# EAGLE board lv1b-fc-1 (EAGLE 3.55)
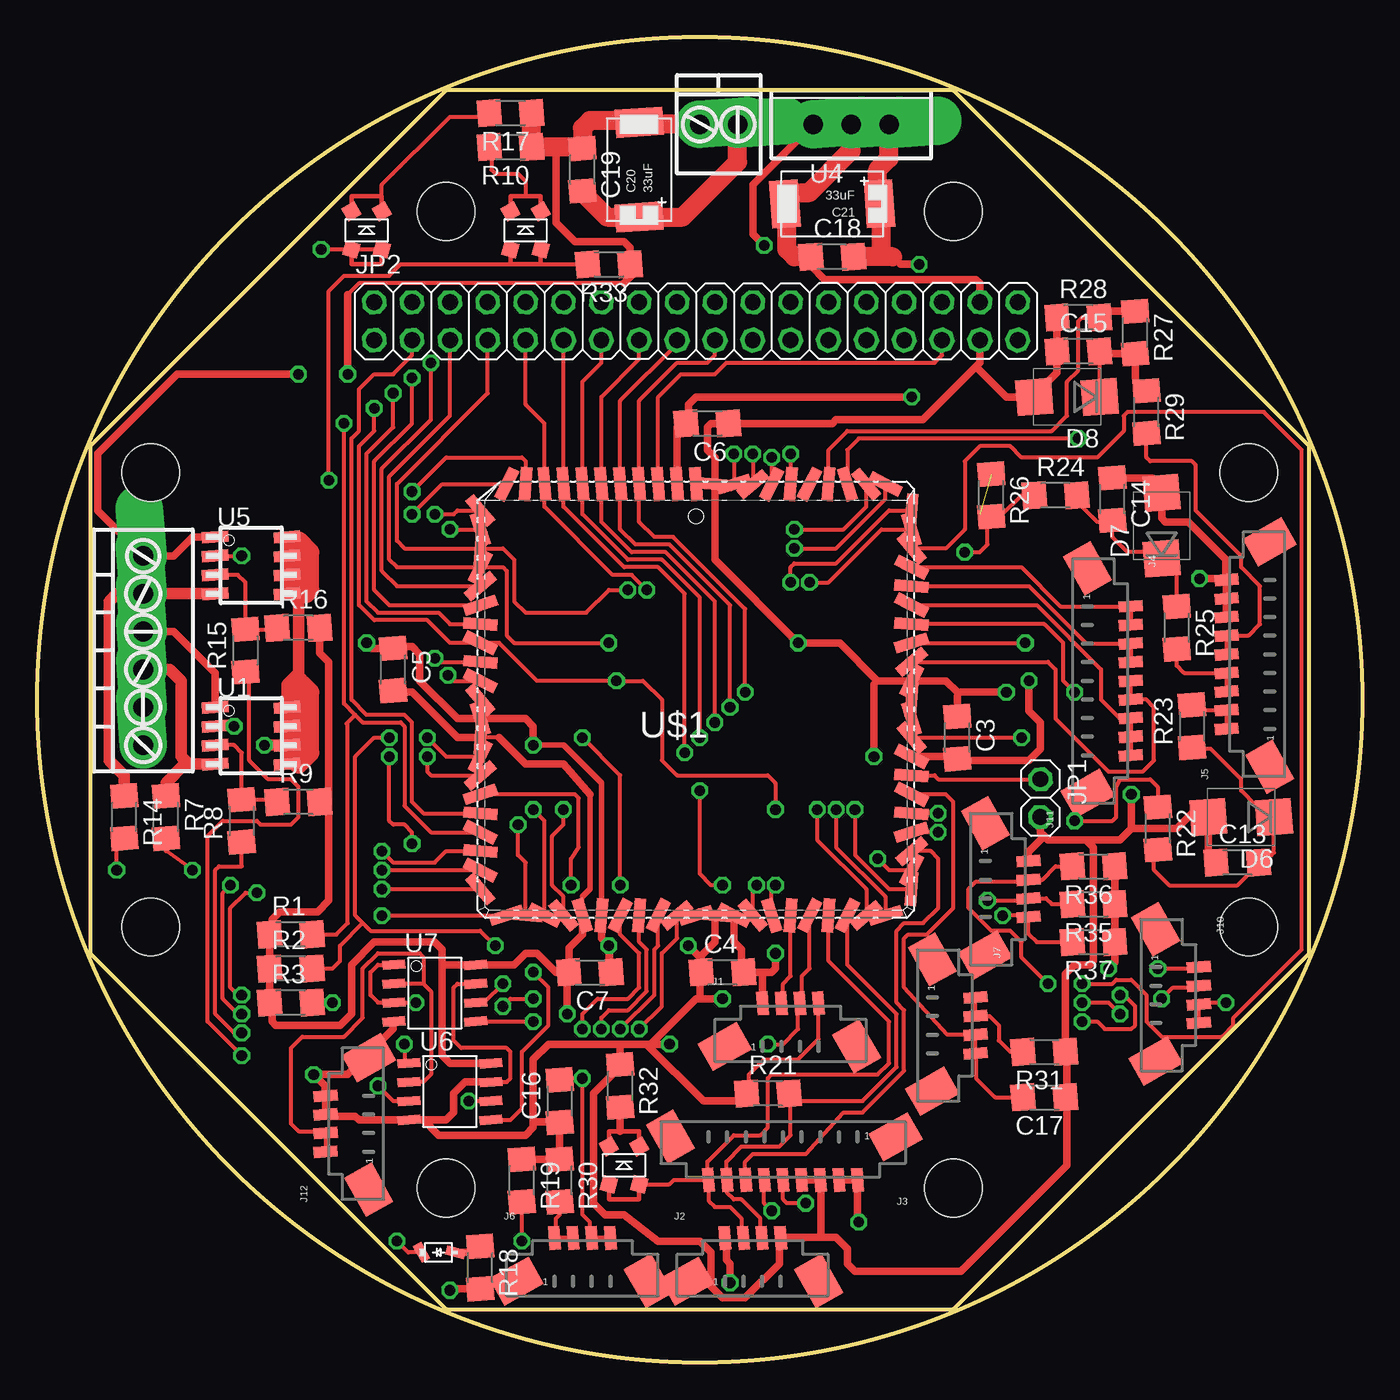
[diagram p0: board, top side]
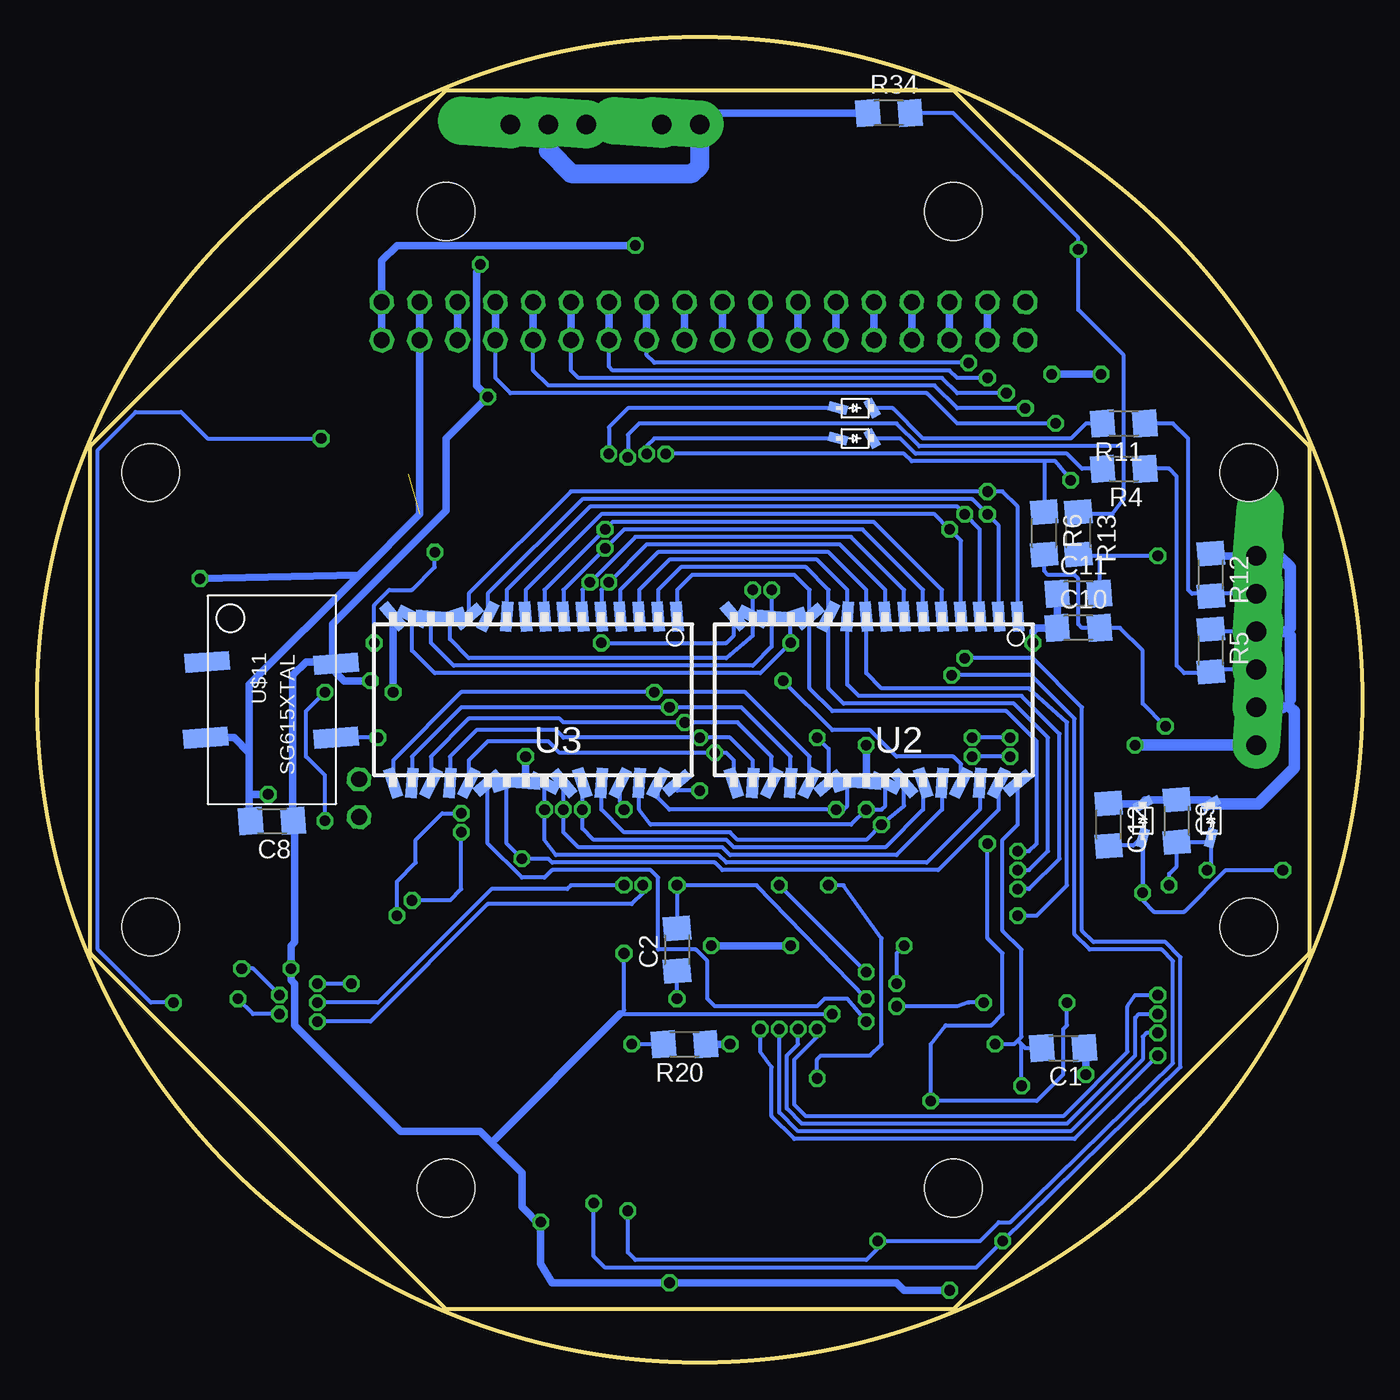
[diagram p1: board, bottom side, seen from below]

Size 88.9 x 88.9 mm. Coordinates in mm from the lower left corner, seen from the top.
Outline: 61.47,85.34 27.43,85.34 3.56,61.47 3.56,27.43 27.43,3.56 61.47,3.56 85.34,27.43 85.34,61.47 61.47,85.34
Outline: circle at 44.45,44.45 radius 44.45
Copper layers used: Top, Bottom
Holes 3.86 mm at 27.43,77.22 61.47,77.22 61.47,11.68 27.43,11.68 81.28,59.69 7.62,59.69 7.62,29.21 81.28,29.21
bKeepout: 2 lines
tRestrict: area 58.2,8.4 to 64.8,15; area 78.2,26.1 to 84.4,32.3; area 78.1,56.5 to 84.4,62.8; area 58.3,74.1 to 64.6,80.4; area 24.3,74.1 to 30.6,80.4; area 4.5,56.5 to 10.8,62.8; area 4.4,26 to 10.8,32.4; area 24.3,8.5 to 30.6,14.8

## Footprints (pad centres in the part's own frame; a part is rotated, then mirrored left to right if it is on the bottom)
206 = smd 1.6 x 1.803 rotated 4.4:  1.422,0 | smd 1.6 x 1.803 rotated 4.3:  -1.422,0
AD = smd 1.905 x 3.175 rotated 3.8:  -3.175,0 | smd 1.905 x 3.175 rotated 4:  3.175,0
INI2P = smd 1.27 x 0.635 rotated 119.4:  -1.143,0 | smd 1.27 x 0.635 rotated 344.5:  1.143,0
B = smd 2.4 x 2.4 rotated 4.3:  -2.2,0 | smd 2.4 x 2.4 rotated 4.4:  2.2,0
INLED = smd 1.016 x 1.016 rotated 344.5: 1 -1.016,1.27; 2 1.016,1.27 | smd 1.016 x 1.016 rotated 119.4: 1 -1.016,-1.27; 2 1.016,-1.27
SMD-4 = smd 2.1 x 3 rotated 209.7: HT 4.425,-0.4 | smd 2.1 x 3 rotated 119.2: T -4.425,-0.4 | smd 0.75 x 1.6 rotated 4.5:  0.625,2.5 | smd 0.75 x 1.6 rotated 4.6:  1.875,2.5 | smd 0.75 x 1.6 rotated 4.3:  -1.875,2.5 | smd 0.75 x 1.6 rotated 4.4:  -0.625,2.5
SMD-9 = smd 2.1 x 3 rotated 209.7: HT 7.55,-0.4 | smd 2.1 x 3 rotated 119.2: T -7.55,-0.4 | smd 0.75 x 1.6 rotated 4.9:  3.75,2.5 | smd 0.75 x 1.6 rotated 5:  5,2.5 | smd 0.75 x 1.6 rotated 4.3:  -5,2.5 | smd 0.75 x 1.6 rotated 4.4:  -3.75,2.5 | smd 0.75 x 1.6 rotated 4.7:  0,2.5;  1.25,2.5 | smd 0.75 x 1.6 rotated 4.8:  2.5,2.5 | smd 0.75 x 1.6 rotated 4.5:  -2.5,2.5 | smd 0.75 x 1.6 rotated 4.6:  -1.25,2.5
TB-6 = drill 1.321 pad 3.175 offset:  0,0;  2.54,0;  5.08,0;  7.62,0;  10.16,0;  12.7,0
TB-2 = drill 1.321 pad 3.175 offset:  -1.27,0;  1.27,0
02 = drill 1.067 pad 1.6 octagon:  -1.27,0;  1.27,0
18 = drill 1.067 pad 1.6 octagon:  -21.59,-1.27;  -21.59,1.27;  -19.05,-1.27;  -19.05,1.27;  -16.51,-1.27;  -16.51,1.27;  -13.97,-1.27;  -13.97,1.27;  -11.43,-1.27;  -11.43,1.27;  -8.89,-1.27;  -8.89,1.27;  -6.35,-1.27;  -6.35,1.27;  -3.81,-1.27;  -3.81,1.27;  -1.27,-1.27;  -1.27,1.27;  1.27,-1.27;  1.27,1.27;  3.81,-1.27;  3.81,1.27;  6.35,-1.27;  6.35,1.27;  8.89,-1.27;  8.89,1.27;  11.43,-1.27;  11.43,1.27;  13.97,-1.27;  13.97,1.27;  16.51,-1.27;  16.51,1.27;  19.05,-1.27;  19.05,1.27;  21.59,-1.27;  21.59,1.27
IC-8 = smd 0.762 x 1.778 rotated 4.3:  -1.778,-2.54 | smd 0.762 x 1.778 rotated 4.4:  -0.508,-2.54 | smd 0.762 x 1.778 rotated 4.5:  0.762,-2.54 | smd 0.762 x 1.778 rotated 4.6:  2.032,-2.54 | smd 0.762 x 1.778 rotated 4.7:  2.032,2.286;  0.762,2.286 | smd 0.762 x 1.778 rotated 4.8:  -0.508,2.286 | smd 0.762 x 1.778 rotated 4.9:  -1.778,2.286
OP = smd 0.762 x 2.032 rotated 4.5:  -7.112,-5.588;  -7.112,5.588 | smd 0.762 x 2.032 rotated 4.6:  -5.842,-5.588 | smd 0.762 x 2.032 rotated 49.4:  3.048,5.588 | smd 0.762 x 2.032 rotated 26.9:  4.318,5.588 | smd 0.762 x 2.032 rotated 4.4:  5.588,5.588;  -8.382,-5.588 | smd 0.762 x 2.032 rotated 206.8:  6.858,5.588 | smd 0.762 x 2.032 rotated 184.3:  8.128,5.588 | smd 0.762 x 2.032 rotated 161.8:  9.398,5.588 | smd 0.762 x 2.032 rotated 71.9:  1.778,5.588 | smd 0.762 x 2.032 rotated 94.4:  0.508,5.588 | smd 0.762 x 2.032 rotated 116.9:  -0.762,5.588 | smd 0.762 x 2.032 rotated 139.4:  -2.032,5.588 | smd 0.762 x 2.032 rotated 161.9:  -3.302,5.588 | smd 0.762 x 2.032 rotated 184.4:  -4.572,5.588 | smd 0.762 x 2.032 rotated 206.9:  -5.842,5.588 | smd 0.762 x 2.032 rotated 27:  -8.382,5.588 | smd 0.762 x 2.032 rotated 49.5:  -9.652,5.588 | smd 0.762 x 2.032 rotated 4.3:  -9.652,-5.588;  1.778,-5.588 | smd 0.762 x 2.032 rotated 4.7:  -4.572,-5.588;  -3.302,-5.588 | smd 0.762 x 2.032 rotated 4.8:  -2.032,-5.588 | smd 0.762 x 2.032 rotated 4.9:  -0.762,-5.588 | smd 0.762 x 2.032 rotated 5:  0.508,-5.588 | smd 0.762 x 2.032 rotated 26.8:  3.048,-5.588 | smd 0.762 x 2.032 rotated 49.3:  4.318,-5.588 | smd 0.762 x 2.032 rotated 71.8:  5.588,-5.588 | smd 0.762 x 2.032 rotated 94.3:  6.858,-5.588 | smd 0.762 x 2.032 rotated 116.8:  8.128,-5.588 | smd 0.762 x 2.032 rotated 139.3:  9.398,-5.588
-220-V = drill 1.321 pad 3.251 offset:  -2.54,0;  0,0;  2.54,0
-8 = smd 0.61 x 1.524 rotated 4.3:  0,-2.743 | smd 0.61 x 1.524 rotated 4.9:  0,2.743 | smd 0.61 x 1.524 rotated 4.4:  1.27,-2.743 | smd 0.61 x 1.524 rotated 4.5:  2.54,-2.743 | smd 0.61 x 1.524 rotated 4.8:  1.27,2.743 | smd 0.61 x 1.524 rotated 4.7:  2.54,2.743;  3.81,2.743 | smd 0.61 x 1.524 rotated 4.6:  3.81,-2.743
CC-84M = smd 2.286 x 0.762 rotated 184.3:  -14.464,5.08 | smd 2.286 x 0.762 rotated 206.8:  -14.464,3.81 | smd 2.286 x 0.762 rotated 4.4:  -14.464,2.54 | smd 2.286 x 0.762 rotated 26.9:  -14.464,1.27 | smd 2.286 x 0.762 rotated 49.4:  -14.464,0 | smd 2.286 x 0.762 rotated 71.9:  -14.464,-1.27 | smd 2.286 x 0.762 rotated 94.4:  -14.464,-2.54 | smd 2.286 x 0.762 rotated 139.7:  14.464,2.54;  14.464,-10.16 | smd 2.286 x 0.762 rotated 117.2:  14.464,1.27;  14.464,-11.43 | smd 2.286 x 0.762 rotated 94.7:  14.464,0;  14.464,-12.7 | smd 2.286 x 0.762 rotated 72.2:  14.464,-1.27 | smd 2.286 x 0.762 rotated 49.7:  14.464,-2.54 | smd 2.286 x 0.762 rotated 27.2:  14.464,-3.81 | smd 2.286 x 0.762 rotated 4.7:  14.464,-5.08 | smd 0.762 x 2.286 rotated 26.8:  -12.7,14.464 | smd 0.762 x 2.286 rotated 4.5:  -2.54,14.464 | smd 0.762 x 2.286 rotated 4.4:  -1.27,14.464 | smd 0.762 x 2.286 rotated 4.3:  0,14.464;  -11.43,14.464 | smd 0.762 x 2.286 rotated 94.9:  1.27,14.464 | smd 0.762 x 2.286 rotated 72.4:  2.54,14.464 | smd 0.762 x 2.286 rotated 49.9:  3.81,14.464 | smd 0.762 x 2.286 rotated 72:  -12.7,-14.464 | smd 0.762 x 2.286 rotated 27.1:  -2.54,-14.464 | smd 0.762 x 2.286 rotated 49.6:  -1.27,-14.464 | smd 0.762 x 2.286 rotated 72.1:  0,-14.464 | smd 0.762 x 2.286 rotated 94.6:  1.27,-14.464 | smd 0.762 x 2.286 rotated 117.1:  2.54,-14.464 | smd 0.762 x 2.286 rotated 139.6:  3.81,-14.464 | smd 2.286 x 0.762 rotated 116.9:  -14.464,-3.81 | smd 2.286 x 0.762 rotated 139.4:  -14.464,-5.08 | smd 2.286 x 0.762 rotated 162.2:  14.464,3.81;  14.464,-8.89 | smd 2.286 x 0.762 rotated 184.7:  14.464,5.08;  14.464,-7.62 | smd 2.286 x 0.762 rotated 207.2:  14.464,-6.35;  14.464,6.35 | smd 0.762 x 2.286 rotated 162.1:  5.08,-14.464 | smd 0.762 x 2.286 rotated 184.6:  6.35,-14.464 | smd 0.762 x 2.286 rotated 4.6:  -3.81,-14.464;  -3.81,14.464 | smd 0.762 x 2.286 rotated 207:  -5.08,-14.464 | smd 2.286 x 0.762 rotated 161.9:  -14.464,-6.35 | smd 0.762 x 2.286 rotated 4.7:  -5.08,14.464;  -6.35,14.464;  8.89,-14.464 | smd 0.762 x 2.286 rotated 27.4:  5.08,14.464 | smd 0.762 x 2.286 rotated 4.9:  6.35,14.464;  -8.89,14.464 | smd 2.286 x 0.762 rotated 161.8:  -14.464,6.35 | smd 0.762 x 2.286 rotated 184.5:  -6.35,-14.464 | smd 0.762 x 2.286 rotated 162:  -7.62,-14.464 | smd 0.762 x 2.286 rotated 139.5:  -8.89,-14.464 | smd 2.286 x 0.762 rotated 184.4:  -14.464,-7.62 | smd 2.286 x 0.762 rotated 206.9:  -14.464,-8.89 | smd 2.286 x 0.762 rotated 4.5:  -14.464,-10.16 | smd 2.286 x 0.762 rotated 139.3:  -14.464,7.62 | smd 2.286 x 0.762 rotated 116.8:  -14.464,8.89 | smd 2.286 x 0.762 rotated 94.3:  -14.464,10.16 | smd 0.762 x 2.286 rotated 4.8:  -7.62,14.464 | smd 2.286 x 0.762 rotated 4.8:  14.464,7.62 | smd 2.286 x 0.762 rotated 27.3:  14.464,8.89 | smd 2.286 x 0.762 rotated 49.8:  14.464,10.16 | smd 0.762 x 2.286 rotated 207.3:  7.62,14.464 | smd 0.762 x 2.286 rotated 184.8:  8.89,14.464 | smd 0.762 x 2.286 rotated 162.3:  10.16,14.464 | smd 0.762 x 2.286 rotated 207.1:  7.62,-14.464 | smd 0.762 x 2.286 rotated 27.2:  10.16,-14.464 | smd 0.762 x 2.286 rotated 94.5:  -11.43,-14.464 | smd 0.762 x 2.286 rotated 117:  -10.16,-14.464 | smd 2.286 x 0.762 rotated 27:  -14.464,-11.43 | smd 2.286 x 0.762 rotated 49.5:  -14.464,-12.7 | smd 2.286 x 0.762 rotated 71.8:  -14.464,11.43 | smd 2.286 x 0.762 rotated 49.3:  -14.464,12.7 | smd 0.762 x 2.286 rotated 5:  -10.16,14.464 | smd 0.762 x 2.286 rotated 139.8:  11.43,14.464 | smd 0.762 x 2.286 rotated 117.3:  12.7,14.464 | smd 2.286 x 0.762 rotated 72.3:  14.464,11.43 | smd 2.286 x 0.762 rotated 94.8:  14.464,12.7 | smd 0.762 x 2.286 rotated 49.7:  11.43,-14.464 | smd 0.762 x 2.286 rotated 72.2:  12.7,-14.464
615PAD = smd 1.27 x 3 rotated 4.3:  0,1.5 | smd 1.27 x 3 rotated 4.4:  5.08,1.397 | smd 1.27 x 3 rotated 4.5:  5.08,10.16 | smd 1.27 x 3 rotated 4.6:  0.127,10.16

## Placement (x,y rotation side)
C1  100nF  [206]  20.07,21.08 180 bottom
C2  100nF  [206]  45.97,27.69 90 bottom
C3  100nF  [206]  61.72,41.91 270 top
C4  100nF  [206]  45.97,26.16 0 top
C5  100nF  [206]  23.88,46.48 270 top
C6  100nF  [206]  44.96,62.99 180 top
C7  100nF  [206]  37.08,26.16 180 top
C8  100nF  [206]  73.15,36.32 180 bottom
C9  100NF  [206]  12.45,36.32 270 bottom
C10  100nF  [206]  19.05,49.28 0 bottom
C11  100nF  [206]  19.05,51.56 0 bottom
C12  100NF  [206]  17.02,36.07 270 bottom
C13  100nF  [206]  80.52,33.53 0 top
C14  100nF  [206]  72.14,57.91 270 top
C15  100nF  [206]  69.85,67.82 0 top
C16  100nF  [206]  35.05,17.53 90 top
C17  100nF  [206]  67.56,17.78 180 top
C18  100nF  [206]  53.34,74.17 0 top
C19  100nF  [206]  36.58,80.01 270 top
C20  33uF  [AD]  40.39,80.01 90 top
C21  33uF  [AD]  53.34,77.72 180 top
D1  [INI2P]  34.04,61.98 180 bottom
D2  [INI2P]  14.73,36.32 270 bottom
D3  [INI2P]  10.16,36.32 270 bottom
D4  [INI2P]  34.04,64.01 180 bottom
D5  [INI2P]  26.92,7.37 0 top
D6  TVS  [B]  80.77,36.58 180 top
D7  TVS  [B]  75.44,56.13 90 top
D8  TVS  [B]  69.09,64.77 180 top
D10  DLNK TX  [INLED]  39.37,13.21 180 top
D11  SHRD FIRE  [INLED]  32.77,75.95 180 top
D12  SEP FIRE  [INLED]  22.1,75.95 180 top
J1  GPS  [SMD-4]  50.55,21.59 0 top
J2  UPLINK  [SMD-4]  48.01,5.84 0 top
J3  ICSP  [SMD-9]  50.04,14.73 180 top
J4  UPLINK  [SMD-9]  70.87,45.72 270 top
J5  LT Comm  [SMD-9]  82.3,47.5 90 top
J6  EXT TEMP  [SMD-4]  36.58,5.84 0 top
J7  SEP DTCT  [SMD-4]  60.45,22.61 270 top
J8  IGNITORS  [TB-6]  7.11,41.4 90 top
J9  POWER  [TB-2]  45.72,83.06 0 top
J10  PA PWR CNTRL  [SMD-4]  75.44,24.64 270 top
J11  SPARE  [SMD-4]  64.01,31.75 270 top
J12  SRAM BATT  [SMD-4]  21.84,16 90 top
JP1  Mode Select  [02]  67.31,37.85 270 top
JP2  ADC Connect  [18]  44.2,69.85 0 top
R1  10k  [206]  17.02,28.7 0 top
R2  10k  [206]  17.02,26.42 0 top
R3  10k  [206]  17.02,24.13 0 top
R4  215  [206]  16,59.94 180 bottom
R5  1K  [206]  10.16,47.75 270 bottom
R6  15K  [206]  21.34,55.63 270 bottom
R7  10K  [206]  8.64,36.58 270 top
R8  15K  [206]  13.72,36.32 90 top
R9  15K  [206]  17.53,37.59 0 top
R10  4.7K  [206]  31.75,81.53 180 top
R11  215  [206]  16,62.99 180 bottom
R12  1K  [206]  10.16,52.83 270 bottom
R13  15K  [206]  19.05,55.63 270 bottom
R14  10K  [206]  5.84,36.58 270 top
R15  15K  [206]  13.97,47.75 90 top
R16  15K  [206]  17.53,49.28 0 top
R17  4.7K  [206]  31.75,83.82 180 top
R18  1k  [206]  29.72,6.35 270 top
R19  1K  [206]  32.51,12.19 270 top
R20  1K  [206]  45.47,21.34 180 bottom
R21  1K  [206]  49.02,18.03 0 top
R22  100  [206]  75.18,35.81 270 top
R23  100  [206]  77.47,42.67 90 top
R24  100  [206]  68.33,58.17 0 top
R25  100  [206]  76.45,49.28 270 top
R26  1K  [206]  64.01,58.17 270 top
R27  100  [206]  73.66,69.09 270 top
R28  1K  [206]  69.85,70.1 0 top
R29  100  [206]  74.42,63.75 270 top
R30  10K  [206]  35.05,12.19 270 top
R31  100K  [206]  67.56,20.83 180 top
R32  4.7K  [206]  39.12,18.54 270 top
R33  1K  [206]  38.35,73.66 180 top
R34  1K  [206]  31.75,83.82 0 bottom
R35  10k  [206]  70.87,30.73 180 top
R36  1k  [206]  70.87,33.27 180 top
R37  10k  [206]  70.87,28.19 180 top
U1  IPS521G  [IC-8]  14.48,42.16 270 top
U2  BANK 1  [OP]  32.77,44.45 180 bottom
U3  BANK 2  [OP]  55.63,44.45 180 bottom
U4  7805-V  [-220-V]  54.61,83.06 0 top
U5  IPS521G  [IC-8]  14.48,53.59 270 top
U6  MXD1210  [-8]  27.69,20.07 270 top
U7  MXD1210  [-8]  26.67,26.67 270 top
U$1  17C766PLCC  [CC-84M]  44.2,44.45 0 top
U$11  SG615XTAL  [615PAD]  78.99,46.99 270 bottom

## Library data of the parts
C1-C19 R1-R37 = ipc-rcl
C20 C21 D1-D8 J1-J12 U1-U7 U$11 = AESS2
D10-D12 = AESS
JP1 JP2 = apcpinhd
U$1 = PIC

## Nets
7-12V: J8. U1. U5.
+5V: C3. C4. C5. C6. C7. C8. C18. C21. J1. J2. J3. R1. R2. R3. R9. R16. R18. R35. R36. R37. U4. U6. U7. U$1. U$11.
+12V: C19. C20. J9. JP2. U4.
/CE1: R3. U6. U$1.
/CE2: R2. U7. U$1.
/CE3: JP2. R1. U$1.
/HBEN: JP2. U$1.
/INT: JP2. U$1.
/RD: JP2. U$1.
A0: U2. U3. U$1.
A1: U2. U3. U$1.
A2: U2. U3. U$1.
A3: U2. U3. U$1.
A4: U2. U3. U$1.
A5: U2. U3. U$1.
A6: U2. U3. U$1.
A7: U2. U3. U$1.
A8: U2. U3. U$1.
A9: U2. U3. U$1.
A10: U2. U3. U$1.
A11: U2. U3. U$1.
A12: U2. U3. U$1.
A13: U2. U3. U$1.
A14: U2. U3. U$1.
A15: U2. U3. U$1.
A16: U2. U3. U$1.
A17: U2. U3. U$1.
A18: U2. U3. U$1.
D0: JP2. U2. U3. U$1.
D1: JP2. U2. U3. U$1.
D2: JP2. U2. U3. U$1.
D3: JP2. U2. U3. U$1.
D4: JP2. U2. U3. U$1.
D5: JP2. U2. U3. U$1.
D6: JP2. U2. U3. U$1.
D7: JP2. U2. U3. U$1.
EXTTEMP: C16. J6. U$1.
FC_MODE: JP1. U$1.
GND: C1. C2. C3. C4. C5. C6. C7. C8. C9. C10. C11. C12. C13. C14. C15. C16. C17. C18. C19. C20. C21. D2. D3. D6. D7. D8. J1. J2. J3. J5. J8. J9. J11. J12. JP1. JP2. R5. R10. R12. R17. R19. R20. R21. R26. R28. R30. R31. R32. R33. R34. U1. U2. U3. U4. U5. U6. U7. U$1. U$11.
IMUTEMP: JP2. U$1.
LDETECT: R22. U$1.
MCLR*: D5. J3. U$1.
N$1: U$1. U$11.
N$2: D4. U$1.
N$3: U2. U6.
N$4: D10.1 R32.
N$6: D1. U$1.
N$7: C10. R6. U1.
N$8: D12.1 R17.
N$10: D5. R18.
N$11: D11.1 R10.
N$12: R8. R9. U1.
N$13: U3. U7.
N$14: J6. R30.
N$16: C11. R13. U5.
N$17: C1. U2. U6.
N$18: J12. U6. U7.
N$19: R15. R16. U5.
N$20: J7. R31.
N$21: C15. D8. R27. R29.
N$24: J5. R23.
N$25: C13. D6. R22. R23.
N$26: J5. R25.
N$27: C14. D7. R24. R25.
N$31: J5. R29.
N$40: C2. U3. U7.
PACTRL0: J10. U$1.
PACTRL1: J10. U$1.
PACTRL2: J10. U$1.
R/W: JP2. U2. U3. U$1.
RA0(IN): J11. R36. U$1.
RA2(OC): J11. R35. U$1.
RA3(OC): J11. R37. U$1.
RKTRDY: R27. R28. U$1.
RX: J1. R20. U$1.
RX(RA4): J2. J3. R21. U$1.
SELFTEST: JP2. U$1.
SEP-IGN: J8. R11. R12. R14. U5.
SEP_GO: D12.1 R13. R34. U$1.
SEP_RDA: C12. D2. R14. U$1.
SEP_RDD: R15. U$1.
SEP_TST: D4. R11.
SEPDTCT: C17. J7. U$1.
SHR-IGN: J8. R4. R5. R7. U1.
SHRD_GO: D11.1 R6. R33. U$1.
SHRD_RDA: C9. D3. R7. U$1.
SHRD_RDD: R8. U$1.
SHRD_TST: D1. R4.
T0CLK1: J3. U$1.
TEST: J3. R19. U$1.
TMINUS5: R24. R26. U$1.
TX: J1. U$1.
TX(RA5): D10.1 J2. J3. U$1.
UL0: J4. U$1.
UL1: J4. U$1.
UL2: J4. U$1.
UL3: J4. U$1.

## Tracks (layer width: path | path; a pad name or v marks a point on that pad's centre or on a via)
7-12V  (via drill 0.71 pad 1.02)
  Top 0.254: 16.76,41.4 16.51,41.4 16.76,41.66 | 17.53,51.31 16.76,51.56
  Top 0.762: 16.76,41.4 16.76,40.13 | 16.76,41.66 16.76,42.67 U1. 16.76,45.47 17.53,46.23 17.53,51.31 | U5. 16.76,54.1 16.76,52.83 16.76,51.56 | v15.24,41.4 16.51,41.4
  Bottom 0.762: 7.11,41.4 v15.24,41.4
+5V  (via drill 0.71 pad 1.02)
  Top 0.254: 61.72,40.51 61.72,40.39 61.47,40.64 | 43.43,62.99 43.18,62.99 42.93,62.74 | 54.74,74.17 56.13,74.17 56.64,74.68 | 56.64,77.47 56.52,77.6 56.52,77.72 | 57.91,73.66 57.4,74.17 | 43.43,62.99 43.56,62.99 | 43.69,63.25 43.43,62.99 | 47.37,26.16 47.5,26.16 47.24,26.42 | 35.68,26.16 35.56,26.16 34.8,26.16 | 36.58,29.99 36.58,31.24 | 30.99,41.91 29.73,41.91 | v27.69,4.83 27.79,4.93 | 72.39,30.73 72.64,30.48 | R35. 72.39,30.73 | 72.39,30.73 72.29,30.84 | R37. 72.39,28.19 72.29,28.3 | R3. 15.6,24.99 15.49,24.89 15.75,24.64 15.75,24.13 15.49,24.38 15.6,24.49 | R2. 15.75,26.42 15.6,26.57 | 15.75,29.72 15.75,28.96 15.49,28.7 R1. 15.75,28.7 | 19.56,37.59 18.95,37.59 | 23.88,44.96 23.88,45.08
  Top 0.381: 36.58,31.24 37.08,31.75 37.08,38.1
  Top 0.508: 61.72,40.39 66.55,40.39 67.31,41.15 67.31,42.93 66.55,43.69 v66.55,45.72 | 42.93,62.74 42.93,58.91 | v59.18,73.66 57.91,73.66 | v58.67,64.77 44.2,64.77 43.69,64.26 43.69,63.25 | 46.74,29.99 46.74,28.19 47.24,27.69 47.24,26.42 | 48.77,26.16 49.28,26.16 49.53,26.42 v49.53,27.43 | 48.77,26.16 47.37,26.16 | 35.68,26.16 35.68,27.81 36.58,28.7 36.58,29.99 | v35.56,23.37 35.56,26.16 | 37.08,38.1 35.31,40.13 32.77,40.13 30.99,41.91 | 27.79,4.93 29.72,4.93 | 72.29,30.84 R36. | 72.29,28.3 R35. | R37. 72.29,26.82 v71.88,26.42 | 34.8,26.16 33.53,27.43 32.77,27.43 32,26.67 29.41,26.67 27.18,26.67 | 27.18,26.67 27.18,20.57 27.69,20.07 30.43,20.07 | 29.73,41.91 28.19,41.91 25.15,44.96 23.88,44.96 | 27.18,26.67 27.18,27.69 26.67,28.19 22.61,28.19 21.08,26.67 21.08,23.37 20.32,22.61 16,22.61 15.75,22.86 15.75,24.13 | 15.6,26.57 R1. | 15.6,24.49 R2. | 18.95,49.28 18.95,47.6 19.56,46.99 19.56,37.59 19.56,30.99 18.8,30.23 16.26,30.23 15.75,29.72 | 61.47,40.64 58.66,40.64 | 55.04,12.23 53.79,12.23 | 55.04,12.23 55.08,12.23 55.12,12.19 | 55.04,12.23 55.04,9.48 v55.12,9.4 | 48.67,24.09 48.67,26.07 48.77,26.16 | v46.48,5.33 46.48,6.6 46.23,6.86 46.23,8.13 46.13,8.23 46.13,8.34
  Top 1.27: 56.64,74.68 56.64,77.47 | 57.4,74.17 54.74,74.17 | U4. 57.15,80.77 56.39,80.01 56.39,77.6 | 56.39,77.6 56.39,77.47 | 56.52,77.72 56.39,77.6
  Bottom 0.254: 59.18,73.41 v59.18,73.66 | 55.12,9.14 v55.12,9.4 | 70.1,46.99 69.85,46.74 69.09,46.74 68.83,46.74 U$11. | 71.63,36.32 71.75,36.32 71.88,36.32 | U$11. 68.83,46.99 | U$11. 68.83,46.23 | v35.56,23.37 49.78,23.37 49.53,23.62 v49.53,27.43
  Bottom 0.508: 59.18,73.41 59.44,73.15 59.44,65.53 v58.67,64.77 61.47,61.98 61.47,57.15 69.09,49.53 69.09,46.74 | 71.75,36.32 71.75,46.1 70.87,46.99 70.1,46.99 | v27.69,4.83 30.73,4.83 31.24,5.33 v46.48,5.33 54.36,5.33 55.12,6.6 55.12,9.14 56.39,10.41 56.39,12.7 58.42,14.73 | v66.55,45.72 68.33,45.72 68.83,46.23 | 71.63,36.32 71.63,28.19 71.88,27.94 v71.88,26.42 71.88,25.65 71.63,25.4 71.63,22.61 64.52,15.49 59.18,15.49 58.42,14.73 | 58.42,14.73 49.78,23.37
+12V  (via drill 0.71 pad 1.02)
  Top 0.254: 36.58,78.49 36.58,78.61
  Top 0.508: 52.07,83.06 48.01,78.99 48.01,75.69 v48.77,74.93
  Top 1.27: 36.58,78.49 38.23,76.84 40.39,76.84 43.31,76.84 46.99,80.52 J9. 52.07,83.06
  Bottom 0.508: 65.79,68.58 JP2. 65.79,73.91 64.77,74.93 v48.77,74.93
/CE1  (via drill 0.71 pad 1.02)
  Top 0.254: v23.62,40.64 23.62,36.32 23.88,36.07 24.64,36.07 25.15,35.56 v25.15,34.8 | 30.73,17.53 30.43,17.53 v28.96,17.53 | 29.73,39.37 26.42,39.37 26.16,39.62 v26.16,40.64 | v19.81,24.13 18.44,24.13
  Bottom 0.254: v23.62,40.64 v26.16,40.64 | v25.15,34.8 25.15,28.45 24.13,27.43 24.13,23.37 24.89,22.61 27.94,22.61 28.96,21.34 v28.96,17.53 21.84,17.53 20.07,19.3 20.07,22.35 19.81,22.61 v19.81,24.13
/CE2  (via drill 0.71 pad 1.02)
  Top 0.254: 29.73,40.64 27.43,40.64 v26.16,41.91 | v23.62,41.91 22.61,41.91 21.34,40.64 21.34,29.97 21.84,29.46 | 21.84,29.46 22.35,28.96 29.72,28.96 v30.73,27.94 | 21.84,29.46 20.32,27.94 20.32,26.92 19.81,26.42 18.44,26.42 | 29.41,24.13 29.97,24.13 v31.24,25.4
  Bottom 0.254: v23.62,41.91 v26.16,41.91 | v30.73,27.94 31.24,27.43 v31.24,25.4
/CE3  (via drill 0.71 pad 1.02)
  Top 0.254: v20.57,62.99 20.57,44.2 21.34,43.43 | 29.97,35.56 29.73,35.56 26.42,35.56 24.64,37.34 24.64,42.67 24.38,42.93 21.84,42.93 21.34,43.43 | 20.83,42.93 21.34,43.43 | 20.83,42.93 20.73,42.82 | 20.83,42.93 20.83,29.46 20.07,28.7 18.44,28.7
  Bottom 0.254: 58.17,68.58 58.17,66.04 57.15,65.02 29.21,65.02 27.18,62.99 v20.57,62.99
  Bottom 0.508: 58.17,68.58 58.17,71.12
/HBEN  (via drill 0.71 pad 1.02)
  Top 0.254: v25.15,66.04 25.15,62.99 22.61,60.45 22.61,51.82 23.62,50.8 29.73,50.8
  Bottom 0.254: 50.55,68.58 50.55,66.8 50.29,66.55 27.69,66.55 27.18,66.04 v25.15,66.04
  Bottom 0.508: 50.55,68.58 50.55,71.12
/INT  (via drill 0.71 pad 1.02)
  Top 0.254: v26.42,67.06 26.42,63.25 23.11,59.94 23.11,53.09 24.13,52.07 29.73,52.07
  Bottom 0.254: 48.01,68.58 48.01,67.56 47.5,67.06 v26.42,67.06
  Bottom 0.508: 48.01,68.58 48.01,71.12
/RD  (via drill 0.71 pad 1.02)
  Top 0.254: v23.88,65.02 23.88,62.74 22.1,60.96 22.1,51.05 22.86,50.29 26.92,50.29 27.69,49.53 29.73,49.53
  Bottom 0.254: 53.09,68.58 53.09,66.55 52.58,66.04 28.19,66.04 27.18,65.02 v23.88,65.02
  Bottom 0.508: 53.09,68.58 53.09,71.12
A0  (via drill 0.71 pad 1.02)
  Top 0.254: 32.77,58.91 32.77,60.45 32.51,60.71 27.43,60.71 v25.15,58.42
  Bottom 0.254: 23.11,50.04 23.11,57.4 24.13,58.42 v25.15,58.42 53.09,58.42 59.94,51.56 59.94,50.04
A1  (via drill 0.71 pad 1.02)
  Top 0.254: 31.5,58.91 27.16,58.91 v25.15,56.9
  Bottom 0.254: 58.67,50.04 58.67,51.56 52.32,57.91 26.16,57.91 v25.15,56.9 24.38,56.13 24.38,50.04
A2  (via drill 0.71 pad 1.02)
  Top 0.254: 29.73,57.15 28.19,57.15 27.94,56.9 v26.67,56.9
  Bottom 0.254: 57.4,50.04 57.4,51.82 51.82,57.4 27.18,57.4 v26.67,56.9 25.65,55.88 25.65,50.04
A3  (via drill 0.71 pad 1.02)
  Top 0.254: v27.69,55.88 29.73,55.88
  Bottom 0.254: 26.92,50.04 26.92,55.12 v27.69,55.88 28.7,56.9 51.05,56.9 56.13,51.82 56.13,50.04
A4  (via drill 0.71 pad 1.02)
  Top 0.254: 55.63,58.91 55.63,57.4 54.1,55.88 v50.8,55.88
  Bottom 0.254: 28.19,50.04 28.19,51.82 32.77,56.39 50.29,56.39 v50.8,55.88 54.86,51.82 54.86,50.04
A5  (via drill 0.71 pad 1.02)
  Top 0.254: 56.9,58.91 56.9,57.91 53.59,54.61 v50.8,54.61
  Bottom 0.254: 29.46,50.04 29.46,51.82 33.53,55.88 49.53,55.88 v50.8,54.61 53.59,51.82 53.59,50.04
A6  (via drill 0.71 pad 1.02)
  Top 0.254: 58.66,55.88 56.64,55.88 53.09,52.32 v51.82,52.32
  Bottom 0.254: 30.73,50.04 30.73,51.82 34.29,55.37 48.77,55.37 v51.82,52.32 52.32,51.82 52.32,50.04
A7  (via drill 0.71 pad 1.02)
  Top 0.254: 58.66,57.15 57.15,57.15 53.59,53.59 50.8,53.59 50.55,53.34 v50.55,52.32
  Bottom 0.254: 32,50.04 32,51.82 35.05,54.86 48.01,54.86 v50.55,52.32 51.05,51.82 51.05,50.04
A8  (via drill 0.71 pad 1.02)
  Top 0.254: v52.32,37.08 52.32,35.05 55.63,31.75 55.63,29.99 55.63,29.97
  Bottom 0.254: 29.46,38.86 29.46,37.08 32,34.54 42.16,34.54 42.67,35.05 51.56,35.05 52.32,35.81 v52.32,37.08 52.32,38.86
A9  (via drill 0.71 pad 1.02)
  Top 0.254: U$1. 56.9,31.24 53.59,34.54 v53.59,37.08
  Bottom 0.254: 53.59,38.86 v53.59,37.08 53.59,35.56 52.58,34.54 42.93,34.54 42.42,34.04 31.24,34.04 28.19,37.08 28.19,38.86
A10  (via drill 0.71 pad 1.02)
  Top 0.254: 58.66,33.02 57.15,33.02 v56.39,33.78
  Bottom 0.254: 24.38,38.86 24.38,37.08 28.45,33.02 42.93,33.02 43.43,33.53 54.36,33.53 54.61,33.78 v56.39,33.78 57.4,34.8 57.4,38.86
A11  (via drill 0.71 pad 1.02)
  Top 0.254: 58.66,31.75 57.15,31.75 54.86,34.04 v54.86,37.08
  Bottom 0.254: 25.65,38.86 25.65,37.08 29.21,33.53 42.67,33.53 43.18,34.04 54.1,34.04 54.86,35.05 v54.86,37.08 54.86,38.86
A12  (via drill 0.71 pad 1.02)
  Top 0.254: 31.5,29.99 23.13,29.99 v23.11,29.97
  Bottom 0.254: 49.78,50.04 49.78,51.82 47.24,54.36 35.81,54.36 33.27,51.82 33.27,50.04 33.27,46.23 32.26,45.21 22.35,45.21 19.81,42.93 19.81,32 21.84,29.97 v23.11,29.97
A13  (via drill 0.71 pad 1.02)
  Top 0.254: 32.77,29.99 32.77,33.53 32.26,34.04 v32.26,36.07
  Bottom 0.254: 30.73,38.86 30.73,37.34 v32.26,36.07 33.27,35.05 41.91,35.05 42.42,35.56 49.53,35.56 51.05,37.08 51.05,38.86
A14  (via drill 0.71 pad 1.02)
  Top 0.254: v23.11,31.75 29.73,31.75
  Bottom 0.254: 48.51,50.04 48.51,51.82 46.48,53.85 36.58,53.85 34.54,51.82 34.54,50.04 34.54,45.47 33.78,44.7 22.86,44.7 20.32,42.16 20.32,33.78 22.35,31.75 v23.11,31.75
A15  (via drill 0.71 pad 1.02)
  Top 0.254: 35.31,29.99 35.31,31.24 34.54,32 34.54,35.31 35.31,36.07 v35.31,37.08
  Bottom 0.254: 47.24,38.86 47.24,37.85 46.48,37.08 v35.31,37.08 34.8,37.08 34.54,37.34 34.54,38.86
A16  (via drill 0.71 pad 1.02)
  Top 0.254: v23.11,33.02 29.73,33.02
  Bottom 0.254: 47.24,50.04 47.24,51.82 45.72,53.34 37.34,53.34 35.81,51.82 35.81,50.04 35.81,45.21 34.8,44.2 23.37,44.2 21.08,41.91 21.08,34.29 22.35,33.02 v23.11,33.02
A17  (via drill 0.71 pad 1.02)
  Top 0.254: 34.04,29.99 34.04,36.32 v33.27,37.08
  Bottom 0.254: 48.51,38.86 48.51,37.08 47.75,36.07 34.29,36.07 v33.27,37.08 32.26,37.08 32,37.34 32,38.86
A18  (via drill 0.71 pad 1.02)
  Top 0.254: v23.11,34.29 23.88,33.53 26.67,33.53 27.43,34.29 29.73,34.29
  Bottom 0.254: 45.97,50.04 45.97,51.82 44.96,52.83 38.1,52.83 37.08,51.82 37.08,50.04 37.08,45.21 35.56,43.69 23.88,43.69 21.84,41.66 21.84,34.8 22.35,34.29 v23.11,34.29
D0  (via drill 0.71 pad 1.02)
  Top 0.254: 27.69,68.58 27.69,63.5 23.62,59.44 23.62,53.85 24.13,53.34 29.73,53.34 31.24,53.34 31.5,53.09 31.5,48.77 32,48.26 v38.35,48.26
  Bottom 0.254: 63.75,50.04 63.75,47.75 62.23,46.23 40.39,46.23 v38.35,48.26 38.35,50.04
  Bottom 0.508: 27.69,68.58 27.69,71.12
D1  (via drill 0.71 pad 1.02)
  Top 0.254: 30.23,68.58 30.23,65.02 24.13,58.93 24.13,55.12 24.64,54.61 29.72,54.61 | 31.24,54.61 29.73,54.61 29.72,54.61 | 31.24,54.61 32,53.85 32,51.05 32.77,50.29 36.83,50.29 38.35,51.82 v39.62,51.82 | 29.72,54.61 31.24,54.61
  Bottom 0.254: 62.48,50.04 62.48,48.26 60.96,46.74 40.89,46.74 39.62,48.01 39.62,50.04 v39.62,51.82
  Bottom 0.508: 30.23,68.58 30.23,71.12
D2  (via drill 0.71 pad 1.02)
  Top 0.254: 32.77,68.58 32.77,64.26 34.04,62.99 34.04,58.91 34.04,57.4 38.61,52.83 39.88,52.83 v40.89,51.82
  Bottom 0.254: 61.21,50.04 61.21,48.51 59.94,47.24 42.67,47.24 40.89,48.77 40.89,50.04 v40.89,51.82
  Bottom 0.508: 32.77,68.58 32.77,71.12
D3  (via drill 0.71 pad 1.02)
  Top 0.254: 35.31,68.58 35.31,58.91 35.31,57.4 39.37,53.34 41.66,53.34 43.43,51.56 v43.43,40.89
  Bottom 0.254: 59.94,38.86 59.94,40.39 58.67,41.66 54.61,41.66 53.85,40.89 v43.43,40.89 42.67,40.89 42.16,40.39 42.16,38.86
  Bottom 0.508: 35.31,68.58 35.31,71.12
D4  (via drill 0.71 pad 1.02)
  Top 0.254: 37.85,68.58 37.85,67.06 36.58,65.79 36.58,58.91 36.58,56.9 39.62,53.85 41.91,53.85 44.45,51.31 v44.45,41.91
  Bottom 0.254: 61.21,38.86 61.21,40.64 59.44,42.42 54.1,42.42 53.59,41.91 v44.45,41.91 42.42,41.91 40.89,40.39 40.89,38.86
  Bottom 0.508: 37.85,68.58 37.85,71.12
D5  (via drill 0.71 pad 1.02)
  Top 0.254: 40.39,68.58 40.39,67.31 37.85,64.77 37.85,58.91 37.85,56.39 39.88,54.36 42.16,54.36 45.47,51.05 v45.47,42.93
  Bottom 0.254: 62.48,38.86 62.48,40.64 59.94,43.18 53.85,43.18 53.59,42.93 v45.47,42.93 41.91,42.93 39.62,40.64 39.62,38.86
  Bottom 0.508: 40.39,68.58 40.39,71.12
D6  (via drill 0.71 pad 1.02)
  Top 0.254: 42.93,68.58 42.93,68.33 39.12,64.52 39.12,58.91 39.12,55.88 40.13,54.86 42.42,54.86 46.48,50.8 v46.48,43.94
  Bottom 0.254: 63.75,38.86 63.75,40.64 60.45,43.94 v46.48,43.94 41.66,43.94 38.35,40.64 38.35,39.12 38.61,38.86 38.35,38.86
  Bottom 0.508: 42.93,68.58 42.93,71.12
D7  (via drill 0.71 pad 1.02)
  Top 0.254: 45.47,68.58 45.47,67.56 44.96,67.06 42.93,67.06 40.39,64.52 40.39,59.18 40.64,58.93 40.63,58.91 40.39,58.91 40.39,56.39 41.4,55.37 42.67,55.37 47.5,50.55 v47.5,44.96
  Bottom 0.254: 65.02,38.86 65.02,40.39 60.45,44.96 v47.5,44.96 41.4,44.96 37.08,40.64 37.08,38.86
  Bottom 0.508: 45.47,68.58 45.47,71.12
EXTTEMP  (via drill 0.71 pad 1.02)
  Top 0.254: 29.73,38.1 36.07,38.1 36.32,37.85 36.32,34.54 35.81,33.78 v35.81,32 | 34.8,18.8 34.93,18.93 35.05,18.93 35.05,19.05 v36.58,19.05 36.58,9.91 37.08,9.4 37.08,8.89 37.34,8.64 37.2,8.5 37.2,8.34 38.31,8.34 38.35,8.38 38.39,8.34 38.45,8.34
  Bottom 0.254: v35.81,32 34.8,32 32.26,28.45 32.26,21.34 33.02,20.57 36.32,20.57 36.58,20.32 v36.58,19.05
FC_MODE
  Top 0.254: 67.31,39.12 60.45,39.12 60.2,39.37 58.66,39.37
GND  (via drill 0.71 pad 1.02)  (1 unrouted)
  Top 0.254: 45.47,58.93 45.47,58.91 | v38.35,27.94 38.48,27.81 38.48,26.16 38.61,26.16 38.35,26.42 | 40.39,83.31 C20. 40.39,83.06 40.51,83.19 40.39,83.31 | 50.16,78.61 C21. 50.16,77.6 50.29,77.47 | 51.94,73.54 51.94,74.17 | 63.25,71.12 63.5,71.12 63.25,71.37 | 44.57,26.16 44.57,27.3 | 45.47,29.99 45.23,29.99 45.21,29.97 45.47,29.72 | 61.72,44.96 61.72,44.7 61.98,44.96 | 44.2,24.38 44.45,24.64 | 44.57,26.29 44.7,26.42 | 44.57,26.29 44.57,26.16 | 44.45,26.16 44.57,26.29 | 58.91,45.72 58.66,45.72 | 37.85,29.97 37.85,29.99 | R30. 34.9,13.61 34.8,13.72 34.7,13.61 | 66.8,64.77 D8. | R28. 68.33,70.1 68.45,69.98 68.45,67.82 | 79.12,33.53 78.99,34.04 78.57,34.46 | 77.98,37.34 D6. | D7. 75.44,58.67 74.8,59.31 | 44.57,26.16 44.57,27.05 | R10. 33.02,81.53 33.17,81.69 | 36.32,81.53 36.45,81.41 36.58,81.41 | 40.64,83.06 40.39,83.31 | 68.83,18.54 68.96,17.78 69.09,17.78 | 39.88,72.9 39.88,73.66 R33. 39.62,73.66 | 39.37,72.39 21.59,72.39 20.83,71.63 | 46.48,62.99 46.36,62.99 | 56.39,45.72 56.13,45.47 | 23.62,48.01 23.75,48.01 23.88,47.88 | 29.41,25.4 28.19,25.4 27.94,25.15 27.94,21.59 28.45,21.08 31.5,21.08 31.75,20.83 31.75,19.05 31.5,18.8 30.43,18.8 | 52.42,24.09 52.42,21.69 51.05,20.32 48.77,20.32 47.75,19.3 47.75,18.03
  Top 0.381: 37.85,29.97 37.85,38.86 35.31,41.4 v33.27,41.4
  Top 0.508: 62.99,66.8 59.44,63.25 53.59,63.25 53.34,62.99 46.48,62.99 45.21,62.99 44.96,62.74 44.96,61.21 45.47,60.71 45.47,58.93 45.47,53.85 v51.05,48.26 53.85,48.26 56.39,45.72 58.91,45.72 60.96,45.72 61.72,44.96 | 62.99,66.8 63.25,67.06 63.25,68.58 | 37.85,29.97 37.85,28.45 v38.35,27.94 38.35,26.42 | v33.27,41.4 33.27,42.67 32.77,43.18 29.73,43.18 28.19,43.18 25.65,45.72 25.65,47.5 25.15,48.01 23.75,48.01 | 51.94,73.54 52.83,72.64 62.99,72.64 63.25,72.39 63.25,71.37 | 44.57,27.3 45.47,28.19 45.47,29.72 | 61.72,44.7 61.72,43.31 | 61.98,44.96 v65.02,44.96 | 44.45,24.64 44.45,26.16 | 39.12,21.34 39.88,21.34 | v45.97,24.38 44.2,24.38 41.15,21.34 | 34.7,13.61 R19. | 70.36,35.05 70.87,34.54 70.87,26.92 70.61,26.67 69.6,26.67 68.99,26.06 R31. 69.09,20.83 69.09,17.78 69.09,13.21 61.98,6.1 54.86,6.1 54.36,6.6 54.36,7.62 53.59,8.38 52.58,8.38 | 70.36,35.05 67.82,35.05 67.56,35.31 | 33.27,16.26 33.27,15.75 32.77,15.24 26.92,15.24 25.91,16.26 | 25.91,16.26 24.94,16.26 21.59,16.26 21.34,16.51 19.56,16.51 19.44,16.63 19.34,16.63 | 62.99,66.8 65.02,64.77 66.8,64.77 68.43,66.4 R28. | D6. 78.57,34.46 | 77.98,37.34 76.45,35.81 73.41,35.81 | 74.8,59.31 72.14,59.31 | 78.99,54.61 77.22,56.39 75.69,56.39 75.44,56.64 D7. | 44.57,27.05 v43.69,27.94 | R33. 39.78,74.78 39.37,75.18 36.07,75.18 34.8,76.45 34.8,81.53 | 11.94,55.37 10.41,55.37 9.14,54.1 J8. 4.06,57.15 4.06,60.96 9.4,66.29 v17.53,66.29 | 11.94,43.94 11.94,46.23 9.14,49.02 7.11,49.02 | 39.88,72.9 39.37,72.39 | 20.83,71.63 v20.83,66.29 | 56.13,45.47 v56.13,40.64 | 23.93,22.86 23.88,22.81 23.88,22.35 20.83,19.3 v18.54,19.3 19.3,18.54 19.3,17.78 19.34,17.82 19.34,17.88 19.34,16.63
  Top 0.508: 23.88,47.88 22.48,47.88 v22.1,48.26 | 30.43,18.8 28.7,18.8 27.94,18.03 27.94,16.76 27.43,16.26 25.91,16.26 | 70.36,35.05 72.64,35.05 73.41,35.81 | JP1. 67.31,35.56 67.56,35.31 | 73.41,35.81 v73.41,38.1 | 35.05,16.13 35.05,16.26 | 35.05,16.13 R30. | 35.05,16.13 33.4,16.13 33.27,16.26 | 33.27,16.26 33.27,20.32 34.29,21.34 39.12,21.34 | 40.89,21.34 41.15,21.34 | 39.12,20.07 38.61,19.56 38.61,19.3 37.34,18.03 37.34,10.67 38.1,9.91 39.37,9.91 41.66,8.13 44.45,8.13 45.21,7.37 45.21,5.08 45.97,4.32 47.5,4.32 49.78,6.6 49.78,8.38 49.82,8.34 49.88,8.34 50,8.34 50.04,8.38 52.58,8.38 | 52.58,8.38 52.58,12.19 52.54,12.23 51.6,12.23 51.56,12.19 51.52,12.23 J3. | 79.8,51.25 79.8,50 | 79.8,51.25 79.8,51.27 79.76,51.31 | 79.8,52.54 79.8,52.5 | 79.8,52.54 79.8,51.25 | 79.76,52.58 79.8,52.54 | v77.98,52.58 79.76,52.58 | 78.99,54.61 79.08,54.53 | 79.76,52.58 79.76,53.85 78.99,54.61 | 66.51,33.62 66.51,34.25 67.56,35.31 | 40.89,21.34 44.7,17.53 47.5,17.53 47.5,18.03 | 39.12,21.34 40.89,21.34 | 39.12,20.07 R32. | 39.12,21.34 39.12,20.07 | 41.15,21.34 v42.42,21.34 | 19.34,16.63 19.34,16.55 19.3,16.51 | 48.01,17.78 47.75,17.78 47.5,18.03 | 47.75,18.03 R21. 47.5,18.03
  Top 1.27: 36.58,81.41 36.58,82.8 37.08,83.31 40.39,83.31 | 51.94,74.17 50.8,74.17 50.29,74.68 50.29,77.47 | 33.17,81.69 R34. | 36.32,81.53 34.8,81.53 R10. | 44.45,83.06 40.64,83.06 | 54.61,83.06 54.61,81.28 51.82,78.49 50.29,78.49 50.16,78.61
  Bottom 0.254: U2. 42.16,48.77 42.67,48.26 v51.05,48.26 | 74.68,40.89 74.55,40.77 74.68,40.65 | U3. 65.02,50.29 | v45.97,24.38 45.97,26.29 | 18.54,21.08 18.67,21.08 | R5. 10.16,48.77 9.91,49.02 7.11,49.02 | 20.83,49.28 20.57,49.02 20.45,49.15 20.45,49.28 20.45,49.41 20.57,49.53 20.45,49.65 | 14.73,37.47 14.73,37.59 14.6,37.72 | 17.02,37.47 17.02,37.59 16.89,37.47 | 10.16,37.47 10.16,37.59 10.29,37.72 | 7.11,43.94 4.83,43.94 | 4.83,44.45 5.33,43.94 | 4.83,48.77 5.08,49.02 4.83,49.28 | R12. 10.16,54.36 9.91,54.1
  Bottom 0.508: 63.25,71.12 63.25,68.58 63.25,56.9 67.31,52.83 | v33.27,41.4 33.27,38.86 | 74.68,40.89 75.69,41.91 77.6,41.91 | v65.02,44.96 U3. | v56.13,40.64 56.13,38.86 | 67.31,52.83 74.68,45.47 74.68,40.89 | 67.31,52.83 v77.98,52.58 | v43.69,27.94 v38.35,27.94 | v18.54,19.3 18.54,21.08 | v22.1,48.26 22.1,49.02 21.84,49.28 20.83,49.28 | 20.45,49.65 20.45,51.56 | 14.6,37.72 12.45,37.72 10.29,37.72 | 14.73,37.47 16.89,37.47 | J8. 9.91,54.1 | R34. 43.69,83.82 44.45,83.06 | v20.83,66.29 v17.53,66.29 | 74.55,36.32 74.68,36.45 74.68,38.1 | 74.68,40.89 74.68,40.65 | 74.68,38.1 74.68,40.89 | v73.41,38.1 74.68,38.1 | v42.42,21.34 R20.
  Bottom 0.762: 10.16,37.47 6.98,37.47 4.57,39.88 4.57,43.69 4.83,43.94 | 5.33,43.94 7.11,43.94 | 4.83,48.77 4.83,44.45 | 5.08,49.02 7.11,49.02 | J8. 5.59,54.1 4.83,53.34 4.83,49.28
  Bottom 1.27: 54.61,83.06 54.61,81.28 53.09,79.76 44.96,79.76 44.45,80.26 44.45,83.06
IMUTEMP
  Top 0.254: 25.15,68.58 25.15,67.56 23.88,66.29 22.61,66.29 21.59,65.28 21.59,62.48 21.08,61.98 21.08,44.45 22.1,43.43 24.64,43.43 25.15,42.93 25.15,37.59 25.91,36.83 29.21,36.83 29.46,36.58 29.46,36.83 29.72,36.58 29.73,36.59 29.73,36.83
  Bottom 0.508: 25.15,68.58 25.15,71.12
LDETECT  (via drill 0.71 pad 1.02)
  Top 0.254: 58.66,49.53 67.56,49.53 68.83,48.26 68.83,45.72 v69.6,44.96 | v69.6,36.32 72.14,36.32 72.39,36.58 72.39,38.61 72.64,39.12 74.68,39.12 75.18,38.61 R22.
  Bottom 0.254: v69.6,44.96 70.87,43.69 70.87,40.64 69.6,39.37 v69.6,36.32
MCLR*  (via drill 0.71 pad 1.02)
  Top 0.254: 29.73,46.99 26.92,46.99 v26.67,47.24 | 25.78,7.37 24.89,7.37 v24.13,8.13 | v51.56,10.67 50.29,10.67 50.04,10.92 50.04,12.23
  Bottom 0.254: v26.67,47.24 22.1,47.24 18.8,43.94 18.8,28.96 18.03,28.19 13.21,28.19 12.19,27.18 12.19,19.81 v24.13,8.13 25.91,6.35 50.8,6.35 51.56,7.11 v51.56,10.67
N$1  (via drill 0.71 pad 1.02)
  Top 0.254: 58.66,41.91 v66.04,41.91
  Bottom 0.254: v66.04,41.91 68.83,41.91
N$2  (via drill 0.71 pad 1.02)
  Top 0.254: v50.55,60.96 50.55,58.91
  Bottom 0.254: v50.55,60.96 50.55,62.74 49.28,64.01 D4. 35.05,63.75
N$3  (via drill 0.71 pad 1.02)
  Top 0.254: v36.58,41.91 39.12,39.37 v39.12,32 | U6. 31.75,16.26 32.51,17.02 32.51,20.83 34.29,22.61 34.29,25.15 v33.27,26.16
  Bottom 0.254: 35.81,38.86 35.81,41.15 v36.58,41.91 | v33.27,26.16 v39.12,32
N$4
  Top 0.254: 39.12,15.49 40.39,15.49 D10.1
  Top 0.508: 39.12,15.49 39.12,17.12
N$6  (via drill 0.71 pad 1.02)
  Top 0.254: v48.01,60.96 48.01,58.91
  Bottom 0.254: v48.01,60.96 48.01,61.47 47.5,61.98 D1.
N$7  (via drill 0.71 pad 1.02)
  Top 0.254: 11.94,42.67 v13.21,42.67
  Bottom 0.254: 21.34,54.36 21.34,54.2 21.34,53.09 21.08,52.83 19.3,52.83 19.05,52.58 19.05,49.53 18.8,49.28 17.65,49.28 16.26,49.28 14.73,47.75 14.73,44.2 v13.21,42.67
N$8
  Top 0.254: D12.1 23.11,78.99 27.69,83.57 29.72,83.57 30.23,84.07 30.33,83.97 30.33,83.82
N$10
  Top 0.508: R18. 29.72,7.62 29.46,7.37 D5.
N$11
  Top 0.254: D11.1 33.78,78.23 32.77,78.23 32.77,79.25 32.26,79.76 30.73,79.76 30.48,80.01 30.48,81.53 30.33,81.53
N$12
  Top 0.254: R9. 15.75,37.59 15.6,37.74 13.72,37.74 13.72,40.89 13.21,41.4 11.94,41.4
N$13  (via drill 0.71 pad 1.02)
  Top 0.254: U7. v33.27,22.86
  Bottom 0.254: 58.67,38.86 58.67,34.8 56.39,32.51 54.86,32.51 54.36,33.02 47.75,33.02 47.24,32.51 47.24,27.69 44.7,27.69 43.94,26.92 43.94,24.38 43.43,23.88 36.58,23.88 36.07,24.38 34.54,24.38 v33.27,22.86
N$14
  Top 0.254: 35.05,10.77 35.05,9.91 34.8,9.65 34.8,8.38 34.76,8.34 34.7,8.34 35.77,8.34 35.81,8.38 35.85,8.34 J6.
N$15
  Top 1.27: 17.27,55.12 17.53,54.86 17.53,51.56 18.03,51.56 18.29,51.82 18.29,54.36 17.53,55.12
N$16  (via drill 0.71 pad 1.02)
  Top 0.254: 11.94,54.1 v13.72,54.1
  Bottom 0.254: 17.65,51.56 17.65,53.97 17.78,54.1 | 19.05,54.2 19.05,54.1 17.78,54.1 | v13.72,54.1 17.78,54.1
N$17  (via drill 0.71 pad 1.02)
  Top 0.254: v24.64,21.34 24.64,20.07 24.94,20.07 | 24.89,17.53 24.94,17.53 23.88,17.53 v22.86,18.54
  Bottom 0.254: 23.11,38.86 23.11,36.07 24.13,35.05 24.13,28.96 22.86,27.69 22.86,21.84 23.11,21.59 | v24.64,21.34 23.37,21.34 23.11,21.59 | 21.47,21.08 22.61,21.08 23.11,21.59 | v22.86,18.54 22.86,21.34 23.11,21.59
N$18
  Top 0.254: 24.94,18.8 25.91,18.8 26.42,19.3 26.42,24.89 25.91,25.4 | 23.88,25.4 23.93,25.4 25.91,25.4 | 25.91,25.4 25.4,25.4 | 25.91,25.4 25.91,27.18 25.65,27.43 22.86,27.43 21.84,26.42 21.84,23.11 20.57,21.84 17.78,21.84 17.02,21.08 17.02,16 17.53,15.49 19.05,15.49 19.3,15.24 19.34,15.28 J12. 19.34,14.26 19.3,14.22 19.34,14.18 19.34,14.13
N$19
  Top 0.254: 11.94,52.83 13.46,52.83 13.97,52.32 13.97,49.17 | 13.97,49.17 13.97,49.02 | R16. 16.26,49.28 16.15,49.17 13.97,49.17
N$20
  Top 0.254: 62.95,24.48 62.95,23.41 62.99,23.37 62.95,23.33 J7. 63.89,23.23 64.52,22.61 64.52,21.59 65.28,20.83 66.14,20.83 66.29,20.83
N$21
  Top 0.254: 71.29,64.77 71.29,67.73 71.37,67.82 71.25,67.82 71.12,67.82 71.27,67.67 | R29. 74.42,65.28 73.66,66.04
  Top 0.508: 71.27,67.67 73.66,67.67 73.66,66.04
N$22
  Top 1.27: 17.78,45.47 18.29,44.96 18.29,40.89 17.53,40.13 17.53,45.72
N$24
  Top 0.254: 79.8,42.5 79.8,43.65 79.76,43.69 79.8,43.73 79.8,43.75 77.92,43.75 77.47,44.2 77.47,44.09
N$25
  Top 0.254: 82.97,36.58 82.97,34.2 82.8,34.04 81.92,33.53 | 81.92,33.53 81.53,34.04 | 81.92,33.53 81.92,33.4 80.52,32 75.95,32 74.93,33.02 74.93,34.29 75.18,34.54 75.18,34.39 | R23. 77.57,41.15 78.74,41.15 80.77,39.12 80.77,38.35 81.79,37.34 82.8,37.34 82.97,36.58 | 82.97,36.58 83.06,37.34
N$26
  Top 0.254: 76.3,47.85 76.2,47.75 | 76.3,47.85 76.45,47.85 76.45,46.74 76.94,46.25 J5. 79.78,46.25 79.76,46.23 79.8,46.19 79.8,45 | 76.3,47.85 76.36,47.91
N$27
  Top 0.254: R25. 76.45,52.83 75.44,53.85 | 69.75,58.17 69.75,57.76 71.12,56.39 71.37,56.39 71.63,56.64 71.88,56.64 72.14,56.39 72.14,56.51 72.14,55.37 73.15,54.36 74.93,54.36 75.44,53.85 | 75.44,53.85 75.44,53.93
N$31
  Top 0.254: 74.42,62.33 74.42,60.71 74.68,60.45 77.47,60.45 77.72,60.2 77.72,57.15 80.77,54.1 80.77,53.34 82.04,52.07 82.04,49.53 81.28,48.77 80.01,48.77 79.99,48.75 79.8,48.75 79.78,48.75 | 79.78,48.75 79.76,48.77 | 79.8,47.5 79.8,48.73 79.78,48.75
N$40  (via drill 0.71 pad 1.02)
  Top 0.254: v31.24,23.88 31.75,24.38 v33.27,24.38 | 23.88,24.13 23.93,24.13 | 23.93,26.67 22.86,26.67 22.35,26.16 22.35,24.64 22.86,24.13 23.88,24.13 | 23.93,24.13 23.93,24.08 23.88,24.13 | 23.93,24.13 v25.4,24.13 | v44.45,38.35 44.45,32.77 45.21,32 v45.97,32
  Bottom 0.254: 45.97,29.09 v45.97,32 40.64,32 v33.27,24.38 | v44.45,38.35 45.97,38.35 45.97,38.86 | v25.4,24.13 26.42,24.13 27.18,23.88 v31.24,23.88
PACTRL0  (via drill 0.71 pad 1.02)
  Top 0.254: 48.01,29.99 48.01,31.75 v48.26,32 | v70.1,22.86 71.12,22.86 71.63,22.35 73.41,22.35 73.66,22.61 73.66,23.88 72.9,24.64 v72.64,24.64 | 77.94,26.51 77.82,26.51 77.72,26.42 v75.18,26.42
  Bottom 0.254: v48.26,32 48.26,31.5 49.02,30.73 58.67,30.73 66.55,22.86 v70.1,22.86 | v72.64,24.64 74.42,26.42 v75.18,26.42
PACTRL1  (via drill 0.71 pad 1.02)
  Top 0.254: 49.28,29.99 49.28,31.75 v49.53,32 | v70.1,24.13 71.88,24.13 v72.64,23.37 | v75.44,24.38 76.2,25.15 77.98,25.15 77.94,25.19 J10.
  Bottom 0.254: v49.53,32 53.09,32 53.34,31.75 58.42,31.75 66.04,24.13 v70.1,24.13 | v72.64,23.37 74.42,23.37 v75.44,24.38
PACTRL2  (via drill 0.71 pad 1.02)
  Top 0.254: 54.36,58.91 54.36,61.21 55.12,61.98 v69.85,61.98 | 77.94,22.76 77.94,23.66 77.72,23.88 77.86,24.01 77.94,24.01 77.94,24.09 77.98,24.13 v79.76,24.13
  Bottom 0.254: v69.85,61.98 77.47,61.98 79.25,63.75 82.3,63.75 84.84,61.21 84.84,27.69 81.28,24.13 v79.76,24.13
R/W  (via drill 0.71 pad 1.02)
  Top 0.254: v22.61,64.01 22.61,62.48 21.59,61.47 21.59,50.8 22.61,49.78 26.16,49.78 27.69,48.26 29.72,48.26 | v49.53,37.08 49.53,38.86 49.02,39.37 42.93,39.37 41.91,40.39 41.91,44.45 40.64,45.72 v38.86,45.72 33.53,45.72 30.99,48.26 29.73,48.26
  Top 0.406: 29.73,48.26 29.72,48.26
  Bottom 0.254: 55.63,68.58 55.63,66.55 54.61,65.53 28.7,65.53 27.18,64.01 v22.61,64.01 | 26.92,38.86 26.92,40.13 27.43,40.64 31.24,40.64 33.02,42.42 35.56,42.42 v38.86,45.72 | v49.53,37.08 49.53,37.34 49.78,37.59 49.78,38.86
  Bottom 0.508: 55.63,68.58 55.63,71.12
RA0(IN)  (via drill 0.71 pad 1.02)
  Top 0.254: 58.66,54.61 60.96,54.61 62.23,55.88 62.23,60.45 63.25,61.47 65.28,61.47 66.04,60.71 71.12,60.71 72.9,62.48 72.9,63.5 73.15,63.75 82.3,63.75 84.84,61.21 84.84,27.69 80.26,23.11 80.26,22.61 79.5,21.84 75.44,21.84 74.42,22.86 74.42,24.64 73.41,25.65 72.39,25.65 72.14,25.4 v70.1,25.4 | v67.82,25.4 66.04,27.18 66.04,28.19 65.28,28.96 64.01,28.96 62.48,30.48 62.48,31.75 62.99,32.26 66.29,32.26 66.41,32.38 J11. 67.43,32.38 68.33,33.27 69.44,33.27
  Bottom 0.254: v67.82,25.4 v70.1,25.4
RA2(OC)  (via drill 0.71 pad 1.02)
  Top 0.254: v60.45,35.56 58.66,35.56 | 69.44,30.73 68.07,30.73 67.68,31.13 66.51,31.13 66.43,31.13 66.29,30.99 v63.75,30.99
  Bottom 0.254: v60.45,35.56 60.45,31.75 61.21,30.99 v63.75,30.99
RA3(OC)  (via drill 0.71 pad 1.02)
  Top 0.254: v60.45,36.83 58.66,36.83 | 69.44,28.19 67.06,28.19 66.51,28.74 66.51,29.88 66.51,29.93 66.55,29.97 v64.77,29.97
  Bottom 0.254: v60.45,36.83 61.72,36.83 63.5,35.05 63.5,33.53 64.77,32.26 v64.77,29.97
RKTRDY
  Top 0.254: 71.78,70.51 71.37,70.1 71.27,70.1 70.1,70.1 69.85,69.85 69.85,66.55 69.09,65.79 69.09,63.5 68.07,62.48 54.36,62.48 53.09,61.21 53.09,58.91
  Top 0.508: 71.78,70.51 R27.
RX  (via drill 0.71 pad 1.02)
  Top 0.254: v49.02,21.34 50.04,21.34 51.05,22.35 51.05,24.13 | 51.82,29.99 51.82,26.42 51.31,25.91 51.31,24.38 51.05,24.13 | 51.05,24.13 51.09,24.09 51.17,24.09
  Bottom 0.254: 46.89,21.34 v49.02,21.34
RX(RA4)
  Top 0.254: 54.36,29.99 54.36,26.67 57.66,23.37 57.66,19.81 55.37,17.53 50.55,17.53 | 50.55,17.78 50.44,18.03 50.55,17.53 | 50.55,17.53 50.55,15.24 49.78,14.48 47.24,14.48 46.23,13.46 46.23,12.19 46.27,12.23 46.29,12.23 46.29,11.37 46.74,10.92 47.24,10.92 48.51,9.65 48.51,8.64 48.77,8.38 48.73,8.34 48.63,8.34
SELFTEST
  Top 0.254: 60.71,68.58 60.71,67.56 60.2,67.06 46.23,67.06 45.47,66.29 43.18,66.29 41.66,64.77 41.66,58.91
  Bottom 0.508: 60.71,68.58 60.71,71.12
SEP-IGN
  Top 0.762: R14. 5.84,39.37 4.83,40.39 4.83,51.05 5.33,51.56 7.11,51.56 11.94,51.56
  Bottom 0.254: R11. 12.7,62.99 11.68,61.98 11.68,51.82 11.43,51.56 10.16,51.56 | 7.11,51.56 10.16,51.56 | 10.16,51.56 10.16,51.41
SEP_GO  (via drill 0.71 pad 1.02)
  Top 0.254: v19.05,74.68 23.11,74.68 | v49.28,60.71 49.28,58.91
  Bottom 0.254: 30.33,83.82 27.43,83.82 19.05,75.44 v19.05,74.68 19.05,70.61 16,67.56 16,61.47 | 16,61.47 16,57.91 16.76,56.9 19.05,56.9 R13. | v49.28,60.71 49.28,62.23 48.51,62.99 31.24,62.99 29.72,61.47 16,61.47
SEP_RDA  (via drill 0.71 pad 1.02)
  Top 0.254: 39.12,29.99 39.12,28.7 40.39,27.43 40.39,25.15 39.62,24.38 37.59,24.38 36.58,23.37 v36.58,22.35 | v13.72,24.64 13.46,24.64 12.95,25.15 12.95,30.48 13.97,31.5 v14.73,31.5 | 5.84,35.15 5.84,35.05 5.33,34.54 v5.33,33.02
  Bottom 0.254: v36.58,22.35 36.58,21.84 38.1,20.32 38.1,17.27 37.34,16.51 20.07,16.51 15.75,20.83 15.75,23.88 15.24,24.64 v13.72,24.64 | D2. 14.86,35.18 15.37,34.67 17.02,34.67 | D2. 14.73,35.31 | v14.73,31.5 D2. | D2. 14.73,30.99 13.97,30.23 11.94,30.23 9.14,33.02 v5.33,33.02
SEP_RDD  (via drill 0.71 pad 1.02)
  Top 0.254: 42.93,29.99 42.93,28.45 41.91,27.43 41.91,23.88 v40.39,22.35 | v13.72,20.57 11.43,22.86 11.43,35.31 12.45,36.32 14.73,36.32 14.99,36.07 17.02,36.07 17.53,36.58 17.53,38.61 17.02,39.12 15.49,39.12 14.22,40.39 14.22,46.23 13.97,46.48 R15.
  Bottom 0.254: v40.39,22.35 40.39,20.83 39.62,19.81 39.62,16.51 38.1,14.99 19.3,14.99 v13.72,20.57
SEP_TST
  Bottom 0.254: 32.89,64.01 31.5,64.01 29.46,61.98 19.56,61.98 18.54,62.99 17.27,62.99 | 17.42,62.99 17.27,62.99 | 17.27,62.99 17.02,62.74
SEPDTCT
  Top 0.254: 66.16,17.78 64.26,17.78 62.99,19.05 62.99,20.57 62.95,20.61 62.95,20.73 62.95,21.63 62.74,21.84 62.88,21.98 62.95,21.98 61.08,21.98 58.17,25.15 58.17,28.45 58.42,28.7 59.69,28.7 61.47,30.48 61.47,37.59 60.96,38.1 58.66,38.1
SHR-IGN
  Top 0.254: 9.91,40.13 10.16,40.13
  Top 0.762: 11.94,40.13 10.16,40.13 9.65,40.64 9.65,45.72 8.89,46.48 7.11,46.48 | R7. 8.64,38.86 9.91,40.13
  Bottom 0.254: 7.11,46.48 9.65,46.48 10.16,45.97 10.16,46.33 10.31,46.33 10.41,46.23 11.94,46.23 12.45,46.74 12.45,59.44 12.95,59.94 R4.
SHRD_GO  (via drill 0.71 pad 1.02)
  Top 0.254: v46.74,60.96 46.74,58.91 | 33.78,73.66 33.78,74.68 | 33.78,73.66 36.93,73.66 | 33.78,73.66 24.38,73.66 23.62,72.9 20.57,72.9 19.56,71.88 v19.56,59.18
  Bottom 0.254: v46.74,60.96 30.73,60.96 30.23,60.45 21.34,60.45 | 21.34,60.45 R6. | 21.34,60.45 20.57,60.45 v19.56,59.18
SHRD_RDA  (via drill 0.71 pad 1.02)
  Top 0.254: 40.39,29.99 40.39,28.19 40.89,27.69 40.89,24.89 39.62,23.62 38.35,23.62 37.85,23.11 v37.85,22.35 | v13.72,23.37 13.46,23.37 12.45,24.38 12.45,31.5 v12.95,32 | v10.41,33.02 8.64,34.29 8.64,35.15
  Bottom 0.254: v37.85,22.35 37.85,21.34 38.61,20.57 38.61,17.02 37.59,16 19.81,16 15.24,20.57 15.24,23.11 14.99,23.37 v13.72,23.37 | 12.45,34.92 10.29,34.92 10.16,35.05 D3. 10.16,33.27 v10.41,33.02 | v12.95,32 12.95,32.77 12.45,33.27 12.45,34.92 | 12.45,34.92 12.45,35.31
SHRD_RDD  (via drill 0.71 pad 1.02)
  Top 0.254: 41.66,29.99 41.66,27.94 41.4,27.69 41.4,24.64 v39.12,22.35 | v13.72,22.1 13.21,22.1 11.94,23.37 11.94,33.02 12.19,33.27 13.72,33.27 R8.
  Bottom 0.254: v39.12,22.35 39.12,16.76 37.85,15.49 19.56,15.49 14.73,20.32 14.73,21.84 14.48,22.1 v13.72,22.1
SHRD_TST
  Bottom 0.254: 32.89,61.98 30.99,61.98 29.97,60.96 19.81,60.96 18.8,59.94 17.42,59.94
T0CLK1
  Top 0.254: 58.66,34.29 59.94,34.29 60.45,33.78 60.45,30.48 59.44,29.46 58.17,29.46 57.66,28.96 57.66,24.13 58.17,23.62 58.17,19.56 55.37,16.76 54.1,16.76 51.56,13.97 48.01,13.97 47.5,13.46 47.5,12.45 47.54,12.41 47.54,12.23
TEST  (via drill 0.71 pad 1.02)
  Top 0.254: 29.73,45.72 27.94,45.72 v27.56,46.1 | v32.51,8.13 32.51,10.77 | 48.79,12.23 48.79,12.21 48.77,12.19 48.77,10.67 v49.28,10.16
  Bottom 0.254: v27.56,46.1 22.22,46.1 19.3,43.18 19.3,28.7 18.29,27.69 13.46,27.69 12.7,26.92 12.7,20.07 23.62,9.4 24.38,9.4 25.65,8.13 v32.51,8.13 32.51,7.62 33.27,6.86 48.77,6.86 49.28,7.37 v49.28,10.16
TMINUS5  (via drill 0.71 pad 1.02)
  Top 0.254: R24. 66.04,58.17 64.77,56.9 64.01,56.9 63.86,56.74 | 63.86,56.74 64.01,56.74 | 58.66,48.26 v66.29,48.26 | v62.23,54.36 63.25,54.36 63.75,54.86 63.75,56.13 63.5,56.39 63.86,56.74
  Bottom 0.254: v66.29,48.26 66.29,50.8 65.28,51.82 63.75,51.82 62.23,53.34 v62.23,54.36
TX
  Top 0.254: 50.55,29.99 50.55,25.91 50.04,25.4 50.04,24.38 49.78,24.13 49.82,24.09 J1.
TX(RA5)
  Top 0.254: 53.09,29.99 53.09,26.92 57.15,22.86 57.15,20.07 56.39,19.3 49.28,19.3 49.02,19.05 49.02,15.75 48.51,15.24 46.74,15.24 44.96,13.46 44.96,12.19 45,12.23 45.04,12.23 | 45.04,12.23 42.71,12.23 42.42,11.94 40.39,11.94 | 45.04,12.23 45.04,10.84 45.47,10.41 46.48,10.41 47.24,9.65 47.24,8.64 47.5,8.38 47.46,8.34 J2.
UL0
  Top 0.254: 73.37,50.72 73.37,49.47 | 73.37,50.72 73.37,50.76 73.41,50.8 | 73.37,50.72 68.66,50.72 66.04,53.34 59.18,53.34 58.93,53.09 58.67,53.34 58.66,53.34
UL1
  Top 0.254: 58.42,52.07 58.66,52.07 66.55,52.07 70.4,48.22 73.37,48.22 | 73.37,48.22 J4. | 73.37,48.22 73.41,48.26
UL2
  Top 0.254: 58.66,46.99 67.82,46.99 68.33,46.48 68.33,43.18 71.88,39.62 74.17,39.62 74.93,40.39 74.93,43.94 74.42,44.45 73.66,44.45 73.41,44.7 73.37,44.66 73.37,44.47 73.37,45.68 73.41,45.72 73.37,45.72
UL3
  Top 0.254: 73.35,41.97 73.15,42.16 | 73.35,41.97 73.37,41.97 73.37,43.22 | 73.37,40.72 73.37,41.95 73.35,41.97 | 73.37,43.22 73.37,43.39 73.41,43.43 | 73.37,43.22 72.6,43.22 71.37,44.45 71.37,46.48 67.06,50.8 58.66,50.8